# Altium PCB Roa_Circuit_2nd.PcbDoc
Units mil, origin at the board's own origin, x right, y up, seen from the top; angles counter-clockwise.
Board outline 6575 x 3150 mil, 4 copper layers (Top Layer, Layer 1, Layer 2, Bottom Layer), stack 26.468 mil thick; 43 components, 29 nets, 176 pads, 497 vias.
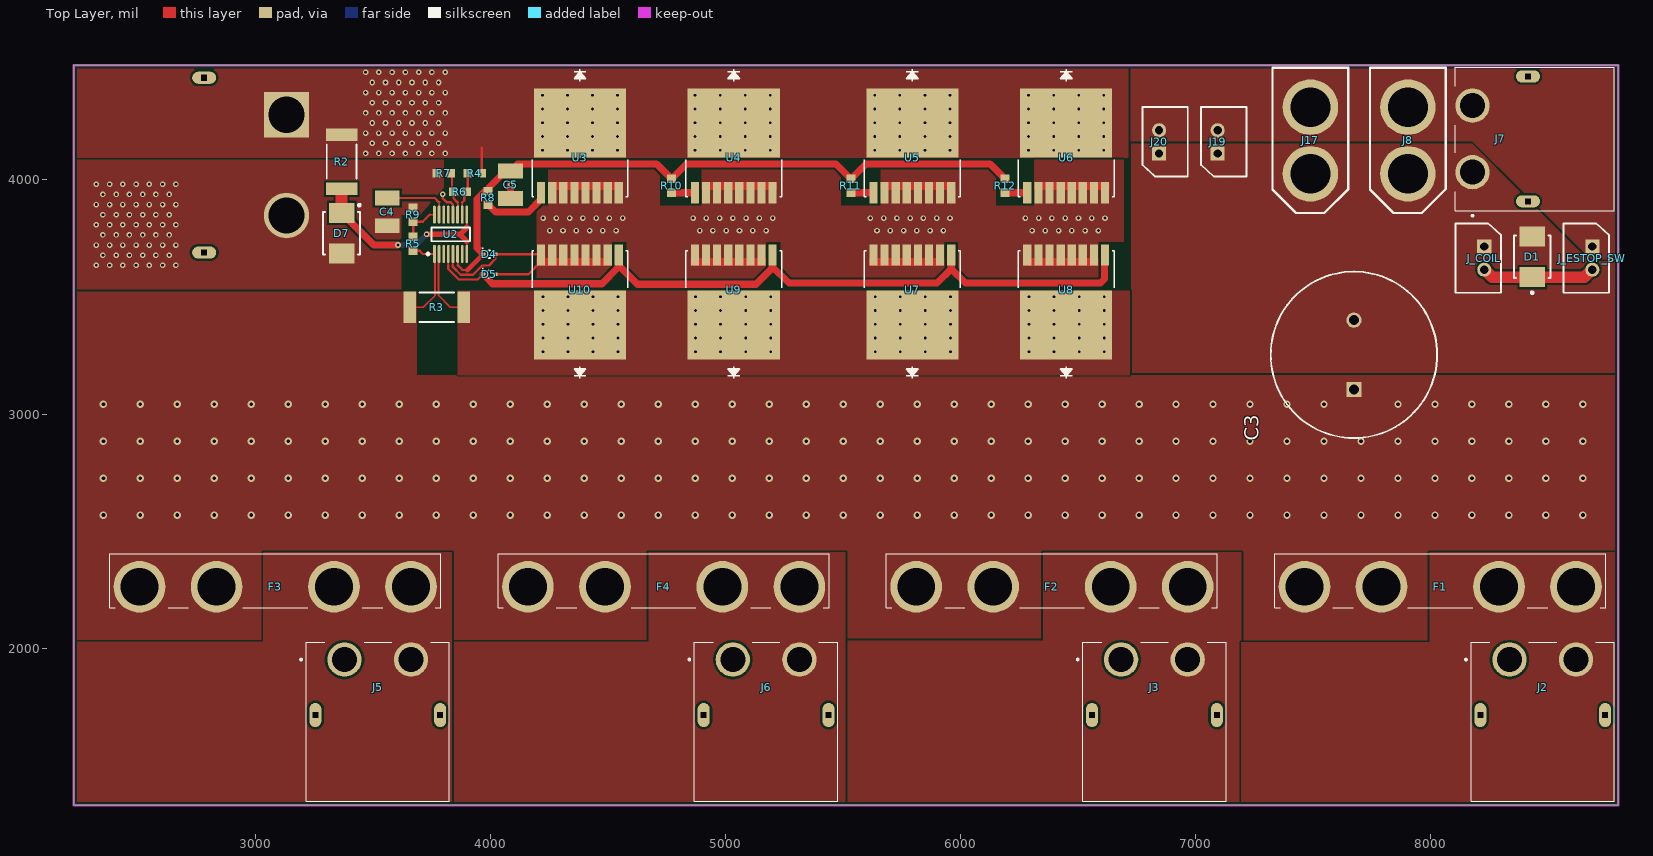
[diagram p0: Top Layer view]
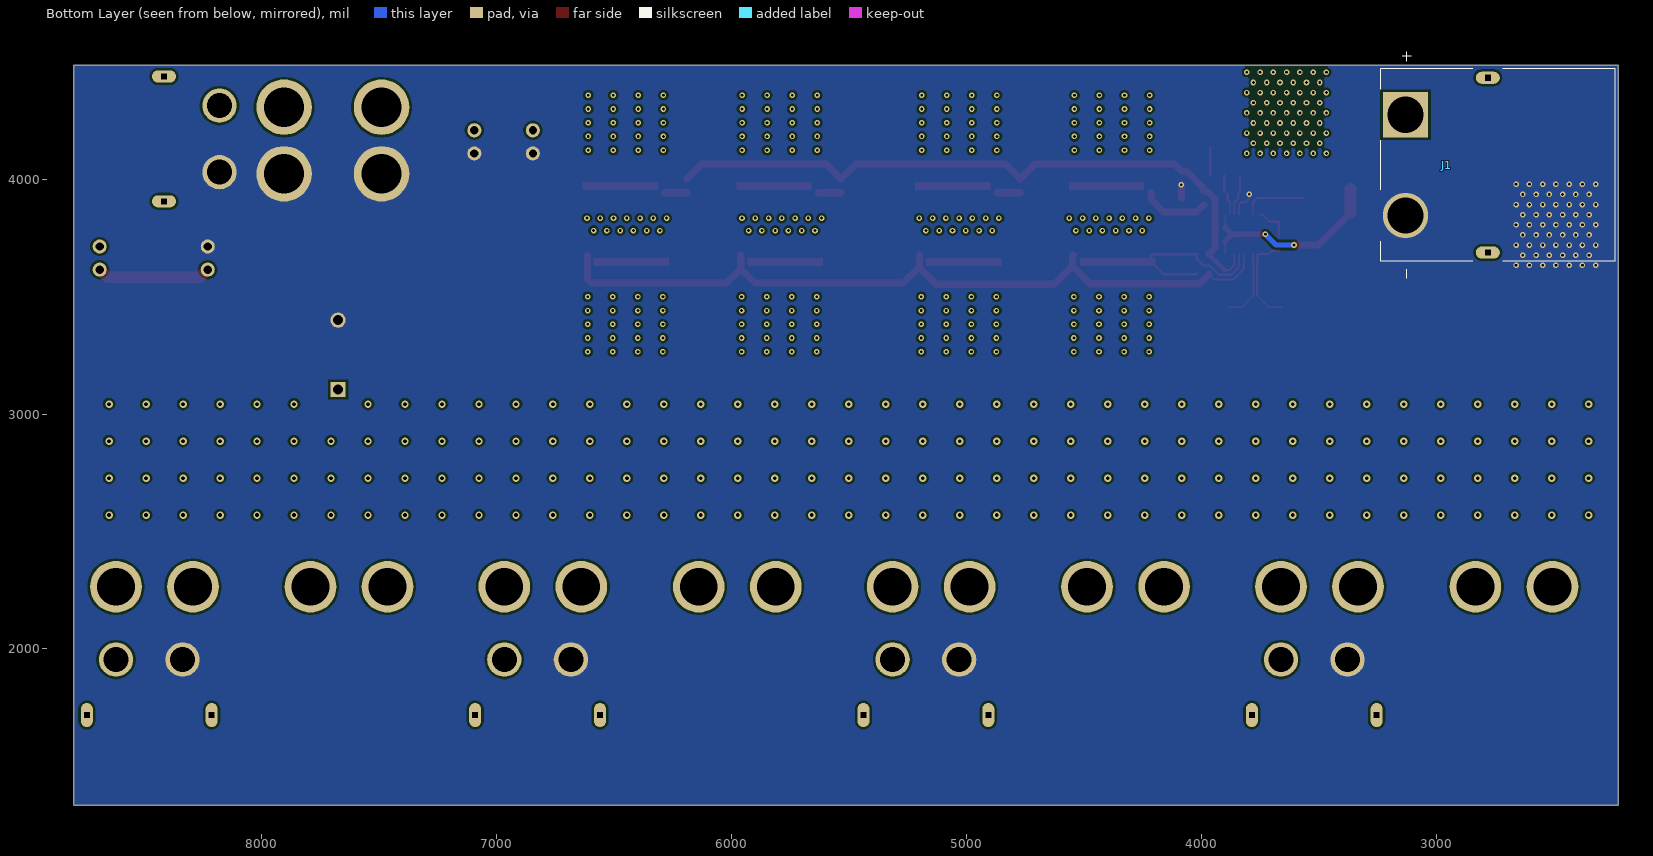
[diagram p1: Bottom Layer view, seen from below]
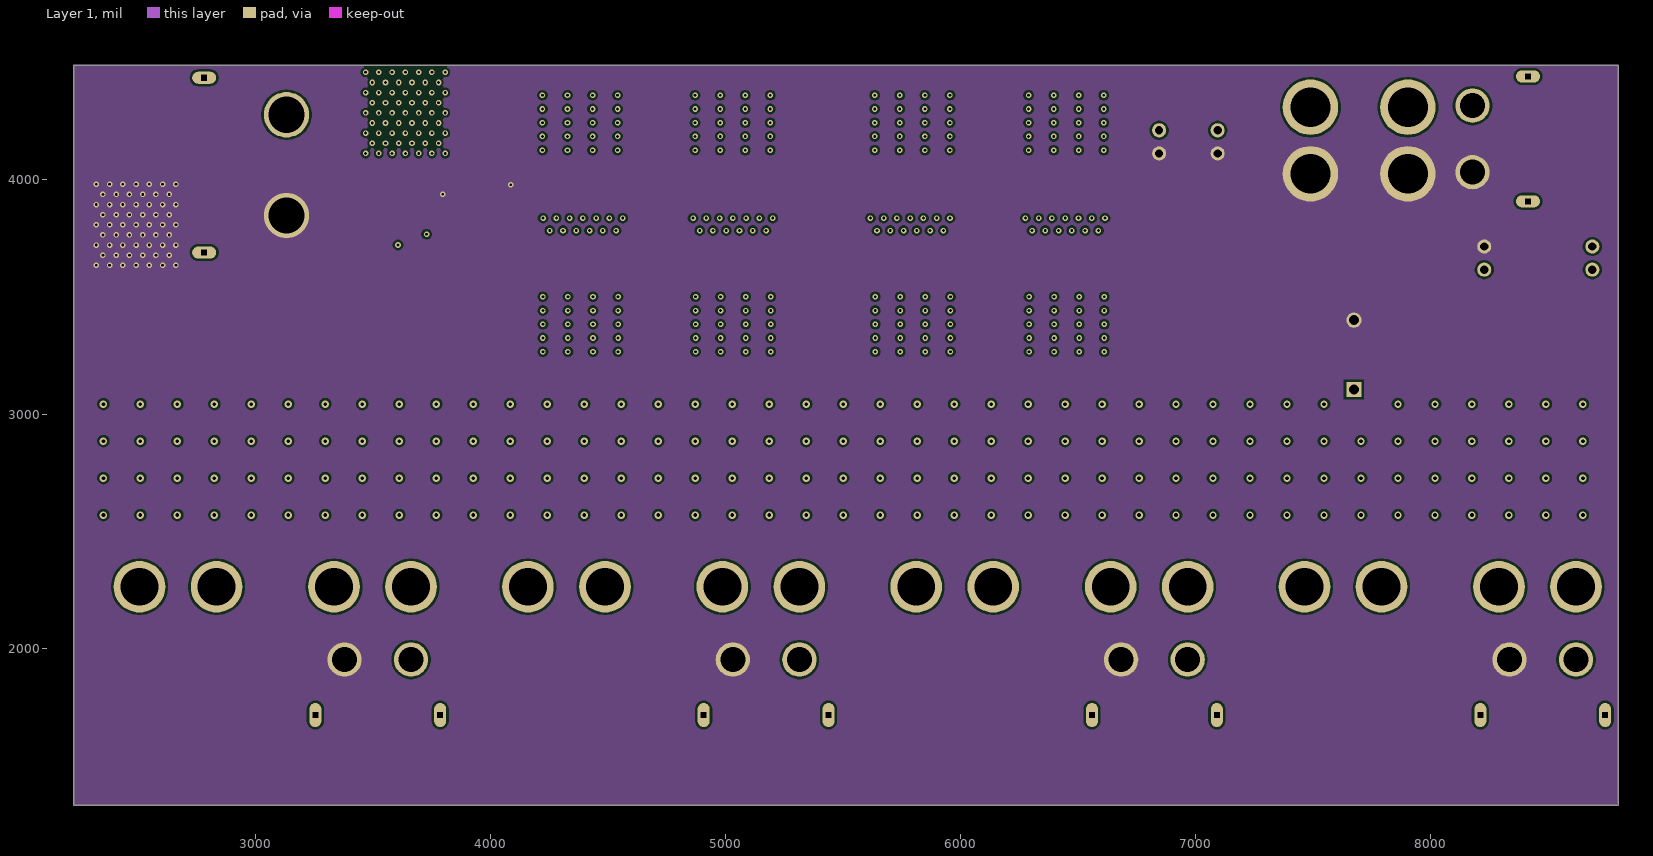
[diagram p2: Layer 1]
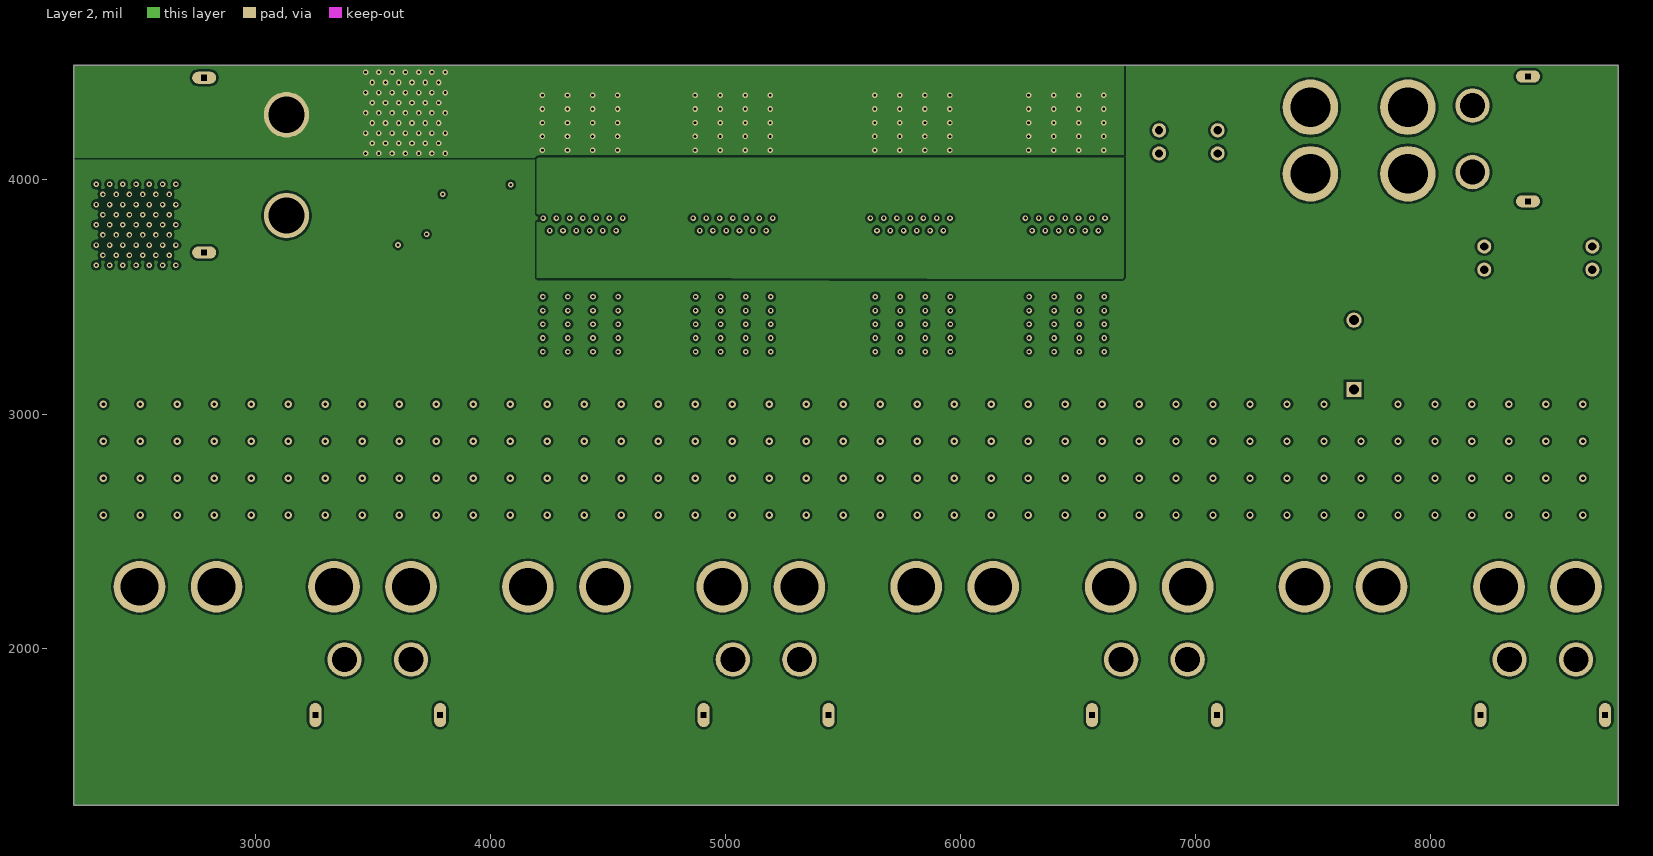
[diagram p3: Layer 2]

## Layer stack, top to bottom
Top Solder: solder mask 0.4, Solder Resist, Dk 3.5
Top Layer: signal copper 2.7559
Dielectric 2: prepreg 2.8, PP-006, Dk 4.1
Layer 1: signal copper 1.378
Dielectric 1: dielectric 12.6, FR-4, Dk 4.8
Layer 2: signal copper 1.378
Dielectric 3: prepreg 2.8, PP-006, Dk 4.1
Bottom Layer: signal copper 2.7559
Bottom Solder: solder mask 0.4, Solder Resist, Dk 3.5

## Board outline
2225,1335 2225,4485 8800,4485 8800,1335.39 8800,1335

## Design rules (kind name [scope] priority, off if disabled: settings)
Clearance "Stitching LEG_L" [IsStitchingVia and InNet('LEG_L') vs (IsVia and (Not IsStitchingVia)) Or IsPad] p1: gap=10 ignorepadtopadclearanceinfootprint=TRUE
Clearance "Stitching I_SENSE_N" [IsStitchingVia and InNet('I_SENSE_N') vs (IsVia and (Not IsStitchingVia)) Or IsPad] p2: gap=5 ignorepadtopadclearanceinfootprint=FALSE
Clearance "Stitching V_IN" [IsStitchingVia and InNet('V_IN') vs (IsVia and (Not IsStitchingVia)) Or IsPad] p3: gap=5 ignorepadtopadclearanceinfootprint=FALSE
Clearance Clearance_1 [InNet('I_SENSE_N') vs InNet('I_SENSE_P')] p4: gap=6 ignorepadtopadclearanceinfootprint=TRUE
Clearance [All] p5: gap=10 ignorepadtopadclearanceinfootprint=TRUE
DiffPairsRouting [All] p1: maxlimit=10 minlimit=6 mostfreqgap=7 toplayer_minwidth=8 toplayer_maxwidth=15 toplayer_prefwidth=10 midlayer1_minwidth=8 midlayer1_maxwidth=15 midlayer1_prefwidth=10 midlayer2_minwidth=8 midlayer2_maxwidth=15 midlayer2_prefwidth=10 bottomlayer_minwidth=8 bottomlayer_maxwidth=15 bottomlayer_prefwidth=10 maxuncoupledlength=500
Height [All] p1: minheight=0 maxheight=2000 prefheight=500
HoleSize [All] p1: absolutevalues=TRUE maxlimit=500 minlimit=1 maxpercent=80.000 minpercent=20.000
PlaneConnect [All] p1: planeconnectstyle=Direct reliefexpansion=20 reliefentries=4 reliefconductorwidth=10 reliefairgap=10
PolygonConnect [All] p1: connectstyle=Direct reliefconductorwidth=10 reliefentries=4 polygonreliefangle="90 Angle" airgapwidth=10
RoutingVias [All] p1: holewidth=28 width=50 viastyle="Through Hole" minholewidth=28 minwidth=50 maxholewidth=28 maxwidth=50
SolderMaskExpansion [All] p1: expansion=4 istentingtop=FALSE
SupplyNets "Schematic Supply Nets" [InNet('GND')] p1: voltage=0.000
Width Width_1 [(InNet('5V') OR InNet('COIL_EN') OR InNet('GND') OR InNet('NetR3_1') OR InNet('I_SENSE_N') OR InNet('I_SENSE_P')or InNet('VCC'))] p1: maxlimit=80 minlimit=6 preferedwidth=50 midlayer1_minwidth=10 midlayer1_maxwidth=10 midlayer1_prefwidth=10 midlayer2_minwidth=10 midlayer2_maxwidth=10 midlayer2_prefwidth=10 bottomlayer_minwidth=10 minimp=50.000000 maximp=50.000000 favimp=50.000000
Width [All] p2: maxlimit=30 minlimit=6 preferedwidth=10 midlayer1_minwidth=10 midlayer1_maxwidth=10 midlayer2_minwidth=10 midlayer2_maxwidth=10 bottomlayer_minwidth=10 bottomlayer_maxwidth=10 minimp=50.000000 maximp=50.000000 favimp=50.000000
26 further rules are at their usual default settings.

## Components (designator, comment, footprint, x,y, rotation, side; value= is the part's Value field where it differs from the comment)
C3 "B41858C9477M000" CAPPRD750W90D1800H3700 7675,3104.72 r90 top
C4 "non-polar_Capacitor" 1210 3559.29,3861.42 r90 top
C5 "non-polar_Capacitor" 1210 4085,3976.44 r90 top
D1 "cc" FP-403A-03-MFG 8435,3670 r90 top
D4 "MM5Z15VT1G" ONSC-SOD-523-2-502-01_V 3994.03,3681.03 r0 top
D5 "MM5Z15VT1G" ONSC-SOD-523-2-502-01_V 3994.03,3595 r0 top
D7 "1SMB5945BT3G" ONSC-SMB-2-403A-03_H_V 3365,3770 r270 top
F1 "3555-2" FUSE_3555-2 8042.56,2265 r180 top
F2 "3555-2" FUSE_3555-2 6389.23,2265 r180 top
F3 "3555-2" FUSE_3555-2 3082.56,2265 r180 top
F4 "3555-2" FUSE_3555-2 4735.89,2265 r180 top
J1 "XT90PW-F" AMASS_XT90PW-F 2780,4060 r90 bottom
J2 "XT60PW-F" XT60PW-F 8478.98,1955 r0 top
J3 "XT60PW-F" XT60PW-F 6825.64,1955 r0 top
J5 "XT60PW-F" XT60PW-F 3518.98,1955 r0 top
J6 "XT60PW-F" XT60PW-F 5172.31,1955 r0 top
J7 "XT60PW-F" XT60PW-F 8180,4171.73 r90 top
J8 "XT60" XT60_F 7905,4165 r90 top
J17 "XT60" XT60_F 7490,4165 r90 top
J19 "Molex_2Pin" MOLEX_2PIN 7095,4208.43 r90 top
J20 "Molex_2Pin" MOLEX_2PIN 6845.71,4208.43 r90 top
J_COIL "Molex_2Pin" MOLEX_2PIN 8230,3615 r270 top
J_ESTOP_SW "Molex_2Pin" MOLEX_2PIN 8690,3615 r270 top
R2 "2.2kΩ" SMD_2512 3365,4075 r270 top
R3 "0.5mΩ" SMD_2512 3770,3455 r180 top
R4 "464kΩ" SMD_0603 3931.65,4025.79 r180 top
R5 "442kΩ" SMD_0603 3669.29,3725.47 r90 top
R6 "6.65kΩ" SMD_0603 3868.54,3946.91 r180 top
R7 "10kΩ" SMD_0603 3799.76,4025.79 r180 top
R8 "10Ω" SMD_0603 3988.74,3920.5 r270 top
R9 "10kΩ" SMD_0603 3669.29,3849.13 r90 top
R10 "10Ω" SMD_0603 4770,3972.03 r270 top
R11 "10Ω" SMD_0603 5533.7,3972.03 r270 top
R12 "10Ω" SMD_0603 6190,3972.03 r270 top
U2 "LTC4364IMS-2#PBF" LT-MS-16_M 3829.29,3765.47 r90 top
U3 "IPT015N10N5ATMA1" PG-HSOF-8-1_INF 4379.65,4139 r0 top
U4 "IPT015N10N5ATMA1" PG-HSOF-8-1_INF 5034.65,4139 r0 top
U5 "IPT015N10N5ATMA1" PG-HSOF-8-1_INF 5795,4139 r0 top
U6 "IPT015N10N5ATMA1" PG-HSOF-8-1_INF 6450,4139 r0 top
U7 "IPT015N10N5ATMA1" PG-HSOF-8-1_INF 5795,3481 r180 top
U8 "IPT015N10N5ATMA1" PG-HSOF-8-1_INF 6450,3481 r180 top
U9 "IPT015N10N5ATMA1" PG-HSOF-8-1_INF 5034.65,3481 r180 top
U10 "IPT015N10N5ATMA1" PG-HSOF-8-1_INF 4379.65,3481 r180 top

## Footprints (in the part's own frame and the unit in brackets; to place one, negate y for a bottom-side part, rotate by r counter-clockwise, add the part's x,y. Pads: shape width x height; smd on the part's side, far side on the other; paste and mask are expansions set on the pad)
1210 [mm]
  rect 1.6x2.7 smd: 1(-1.5,0) 2(1.5,0)
  body extent -1.75,-1.4 1.75,1.4, height 2.8
AMASS_XT90PW-F [mm]
  round 4.916 hole 3.9: N(-5.45,8.9)
  rect 4.916x4.916 / inner round 4.916 / far side rect 4.916x4.916 hole 3.9: P(5.45,8.9)
  oval 1.3x2.6 hole 0.6 square: S1(9.45,0) S2(-9.45,0)
  silkscreen extent -12.25,-13.8 12.25,11.6, body extent -10.65,-13.8 10.65,11.6, height 10.3
CAPPRD750W90D1800H3700 [mm]
  rect 1.65x1.65 hole 1.1: 1(0,0)
  round 1.65 hole 1.1: 2(7.5,0)
  silkscreen extent -5.25,-9 12.75,9, body extent -4.35,-8.1 11.85,8.1, height 35.86
FP-403A-03-MFG [mil]
  rect 85x107.99 smd paste+0 mask+0: 1(-87.01,0) 2(87.01,0)
  silkscreen extent -157,-78 91,78, body extent -133,-82 133,82, height 10
FUSE_3555-2 [mm]
  round 5.59 hole 4.09: 1_1(-14.685,0) 1_2(-6.355,0) 2_1(6.345,0) 2_2(14.675,0)
  silkscreen extent -17.91,-3.59 17.91,2.25, body extent -17.91,-11.51 17.91,-5.67, height 12.97
LT-MS-16_M [mm] "SOP, 16-Leads, Body 4.1x3.1mm, Pitch 0.5mm, IPC Low Density"
  oval 1.95x0.3 smd: 1(-2.125,1.75) 2(-2.125,1.25) 3(-2.125,0.75) 4(-2.125,0.25) 5(-2.125,-0.25) 6(-2.125,-0.75) 7(-2.125,-1.25) 8(-2.125,-1.75) 9(2.125,-1.75) 10(2.125,-1.25) 11(2.125,-0.75) 12(2.125,-0.25) 13(2.125,0.25) 14(2.125,0.75) 15(2.125,1.25) 16(2.125,1.75)
  silkscreen extent -2.25,-2.08 0.75,2.57, body extent -1.55,-2.05 1.55,2.05, height 1.1
MOLEX_2PIN [mil]
  rect 60x60 / inner round 60 / far side round 60 hole 35: 1(-98.43,0)
  round 60 hole 35: 2(0,0)
  silkscreen extent -197,-122 98,71, body extent -196,-123 95,70, height 233
ONSC-SMB-2-403A-03_H_V [mil] "Molded, 2-Leads, Body 4.6x3.95mm"
  rect 85x107.99 smd: 1(-87.01,0) 2(87.01,0)
  silkscreen extent -125,-79 91,81, body extent -91,-78 91,78, height 95
ONSC-SOD-523-2-502-01_V [mm] "SOD, 2-Leads, Body 1.2x0.8mm"
  rect 0.48x0.4 smd: 1(-0.66,0) 2(0.66,0)
  silkscreen extent -0.75,-0.4 0.07,0.65, body extent -0.6,-0.4 0.6,0.4, height 0.7
PG-HSOF-8-1_INF [mil]
  rect 35x91 smd paste+0 mask+0: 1(-165.35,-196.5) 2(-118.11,-196.5) 3(-70.87,-196.5) 4(-23.62,-196.5) 5(23.62,-196.5) 6(70.87,-196.5) 7(118.11,-196.5) 8(165.35,-196.5)
  rect 392x294 smd paste+0 mask+0: 9(0,101)
  Top Layer region: -135.61,-183 -135.61,-151 182.85,-151 182.85,-183
  silkscreen extent -204,-214 204,328
SMD_0603 [mm] "SMD 0603 SIZE"
  rect 0.9x0.95 smd: 1(-0.75,0) 2(0.75,0)
  body extent -0.85,-0.48 0.85,0.48, height 0.55
SMD_2512 [mm] "SMD 2512 SIZE"
  rect 1.35x3.4 smd: 1(-2.925,0) 2(2.925,0)
  silkscreen extent -1.85,-1.6 1.85,1.6, body extent -3.25,-1.7 3.25,1.7, height 0.7
XT60_F [mm]
  round 6 hole 4.3: 1(-3.6,0) 2(3.6,0)
  silkscreen extent -7.85,-4.1 7.85,4.1, body extent -7.8,-4 7.8,4, height 16.8
XT60PW-F [mm]
  round 3.716 hole 2.7: 1(-3.6,0) 2(3.6,0)
  oval 1.3x2.6 hole 0.6 square: S1(-6.75,-6) S2(6.75,-6)
  silkscreen extent -8.4,-15.35 7.75,1.85, body extent -7.75,-15.35 7.75,1.85, height 8.4

## Part data
C3: "Capacitor Polarised", Manufacturer_Name=TDK, Mouser Part Number=871-B41858C9477M, Datasheet Link=https://product.tdk.com/system/files/dam/doc/product/capacitor/aluminum-electrolytic/single-ended/data_sheet/20/30/db/aec/b41858.pdf, Height=37mm, Manufacturer_Part_Number=B41858C9477M000, Mouser Price/Stock=https://www.mouser.co.uk/ProductDetail/EPCOS-TDK/B41858C9477M000?qs=nadT%2FcWsIvCTpIhXZMST%2FQ%3D%3D
C4: library part CMP-024-000020-15, "SMD type ceramic capacitor", Capacitance=0.47µF, Voltage=50V, Design Item ID=Capacitor, Source=robit_passive.SchLib
C5: library part CMP-024-000020-15, "SMD type ceramic capacitor", Capacitance=0.1µF, Voltage=50V, Design Item ID=Capacitor, Source=robit_passive.SchLib
D1: library part CMP-026-000004-1, "Rectifier Diode, Schottky, 1 Phase, 1 Element, 5A, 100V V(RRM), Silicon"
D4 D5: library part CMP-1060-00793-1, "Zener Voltage Regulator, 500 mW, 2-Pin SOD-523, Pb-Free, Tape and Reel", Manufacturer="On Semiconductor", ComponentLink1Description="Manufacturer URL", ComponentLink1URL=http://www.onsemi.com/, ComponentLink2Description=Datasheet, ComponentLink2URL=http://www.onsemi.cn/pub_link/Collateral/MM5Z2V4T1-D.PDF, ComponentLink3Description="Package Specification", ComponentLink3URL=http://www.onsemi.com/pub_link/Collateral/502-01.PDF, DatasheetVersion="Rev. 10", Mounting Technology="Surface Mount", P Max (W)=0.5, PackageDescription="2-Pin SOD, Body 1.2 x 0.8 mm", PackageReference=SOD-523-2-502-01, PackageVersion="Rev. E, 09/2010", Packing="Tape and Reel", PartNumber=MM5Z15VT1G, RoHS=Pb-Free, VZ Typ (V)=15
D7: library part CMP-1060-00175-1, "3 W Zener Voltage Regulator, 2-Pin SMB, Pb-Free, Tape and Reel", Manufacturer="On Semiconductor", ComponentLink1Description="Manufacturer URL", ComponentLink1URL=http://www.onsemi.com/, ComponentLink2Description=Datasheet, ComponentLink2URL=http://www.onsemi.com/pub_link/Collateral/1SMB5913BT3-D.PDF, ComponentLink3Description="Package Specification", ComponentLink3URL=http://www.onsemi.com/pub_link/Collateral/1SMB5913BT3-D.PDF, DatasheetVersion="Rev. 8", Mounting Technology="Surface Mount", PackageDescription="2-Pin Small Molded Package, J-Bend Lead, Body 4.33 x 3.625 mm", PackageReference=SMB-2-403A-03_H, PackageVersion="Rev. H, 05/2011", Packing="Tape and Reel", PartNumber=1SMB5945BT3G, RoHS=Pb-Free, VZ Typ (V)=68
F1 F2 F3 F4: "Auto Fuse Holder, 1 Fuse, Blade, Standard, THM, 50Amp, Hi-Temp Nylon, UL94V-0", Package=None, Check_prices=https://www.snapeda.com/parts/3555-2/Keystone/view-part/?ref=eda, MF="Keystone Electronics", MP=3555-2, SnapEDA_Link=https://www.snapeda.com/parts/3555-2/Keystone/view-part/?ref=snap
J1: library part CMP-019-000093-4, "Socket, DC supply, XT90, female, PIN:2, on PCBs, THT", Package=Package, Check_prices=https://www.snapeda.com/parts/XT90PW-F/AMASS/view-part/?ref=eda, Component Type=Standard, Design Item ID=XT90PW-F, MF=AMASS, MP=XT90PW-F, Pin Count=2, SnapEDA_Link=https://www.snapeda.com/parts/XT90PW-F/AMASS/view-part/?ref=snap, Source=XT90PW-F.SchLib, System=Connector
J2 J3 J5 J6 J7: library part CMP-019-000058-2, "Socket DC Supply Connector Female", Package=Package, Availability="Not in stock", Check_prices=https://www.snapeda.com/parts/XT60PW-F/AMASS/view-part/?ref=eda, Design Item ID=XT60PW-F, MF=AMASS, MP=XT60PW-F, Price=None, SnapEDA_Link=https://www.snapeda.com/parts/XT60PW-F/AMASS/view-part/?ref=snap, Source=robit_connector.SchLib, System=Connector
J8 J17: library part CMP-019-000061-2, "XT60 connector", System=Connector
J19 J20 J_COIL J_ESTOP_SW: library part CMP-019-000043-2, "Molex 2Pin Connector", Design Item ID=Molex_2Pin, Source=robit_connector.SchLib, System=Connector
R2 R3 R4 R5 R6 R7 R8 R9 R10 R11 R12: library part Resistor
U2: library part CMP-0474-00539-1, "Surge Stopper with Ideal Diode, 4 to 80 V Vin, 16-pin SOP (MS-16), -40 to 85 degC, Pb-Free", Extended Temp="C, I, H", Manufacturer="Linear Technology", Power Good=no, Active Limiting=yes, Circuit Breaker Accuracy(%)=10, Circuit Breaker Threshold="50 mV", Circuit Breakers(#)=1, ComponentLink1Description="Manufacturer URL", ComponentLink1URL=http://www.linear.com/, ComponentLink2Description=Datasheet, ComponentLink2URL=http://cds.linear.com/docs/en/datasheet/436412f.pdf, ComponentLink3Description="Package Specification", ComponentLink3URL=http://cds.linear.com/docs/en/packaging/05081669_A_MS16.pdf, Fast Comparator=no, Mounting Technology="Surface Mount", PackageDescription="16-Pin Plastic MSOP, Body 4.04 x 3.00 mm, Pitch 0.50 mm", PackageReference=MS16, PackageVersion="Rev. Ã˜, 06/2010", PartNumber=LTC4364IMS-2#PBF, RoHS=TRUE, Vin Range="4 to 80 V"
U3 U4 U5 U6 U7 U8 U9 U10: "Infineonâ€™s OptiMOSâ„¢ power MOSFET in TO-Leadless package is optimized for high current applications up to 300 A, such as forklifts, light electric vehicles (LEV), power tools, point-of-loads (POL), telecom and e-fuses. Furthermore, the 60 percent smaller package size enables a very compact design. Compared to DÂ²PAK 7-pin, TO-Leadless shows a substantial reduction in footprint of 30 percent. The 50 percent reduced height offers a significant advantage in narrow applications such as rack or blade servers.", Manufacturer_Name=Infineon, Copyright="Copyright (C) 2025 Ultra Librarian. All rights reserved.", Manufacturer_Part_Number=IPT015N10N5ATMA1, RefDes=RefDes, Type=Type

## Via types
v1: diameter 23.62, hole 11.81, Top Layer to Bottom Layer, 334 vias
v2: diameter 31.5, hole 15.75, Top Layer to Bottom Layer, 163 vias

## Nets (pads, with @x,y where several pads share a name; then routed paths per layer and width w, separated by ;. In a path a pad name is that pad's centre, name@x,y a point inside that pad or via, vN(x,y) a via of type N, cw(c..) or ccw(c..) an arc to the next point about the centre after c; other vN are vias at no path point)
5V: 
12v_IN: J7.2 J8.2 J17.2 J19.2 J20.2 J_ESTOP_SW.1
ARM_L: F3.1_1 F3.1_2 J5.2
ARM_R: F1.1_1 F1.1_2 J2.2
CAN_H: 
CAN_L: 
COIL_EN: D1.1 J_COIL.2 J_ESTOP_SW.2 | length 486.5
  Top Layer w50: J_COIL.2 8232.28,3615 8264.29,3582.99 8655.29,3582.99 8687.29,3615 J_ESTOP_SW.2
DGATE: D5.1 U2.4 U7.1 U8.1 U9.1 U10.1 | length 3335.7
  Top Layer w6: 3818.82,3633.59 3818.82,3681.18 U2.4
  Top Layer w10: 3818.82,3633.59 3818.82,3618.4 3863.89,3573.33 3944.8,3573.33 3963.59,3592.13 3965.17,3592.13 D5.1
  Top Layer w30: D5.1 3985.56,3577.48 3985.56,3576.77 4007.33,3555 4473.61,3555 4542.5,3623.89 ; U10.1 4547.5,3675 4547.5,3629.5 4624.22,3552.78 5129.39,3552.78 5195.26,3618.64 5195.26,3621.71 5200.19,3626.64 ; U9.1@5200.19,3677.31 5200.19,3626.64 ; U7.1@5960.54,3677.31 5960.54,3617.78 ; U8.1@6615.35,3675.09 6613.04,3672.78 6613.04,3575.35 6595.47,3557.78 6020.54,3557.78 5960.54,3617.78 ; 5200.19,3626.64 5269.05,3557.78 5900.54,3557.78 5960.54,3617.78
ENABLE: U2.14
FAULT: U2.13
FB: R5.2 R9.1 U2.16 | length 167.9
  Top Layer w6: 3739.63,3849.13 U2.16
  Top Layer w10: R5.2 R9.1 3710.1,3819.61 3739.63,3849.13
GND: C3.2 C4.1 C5.1 D1.2 D7.2 J1.N J2.1 J3.1 J5.1 J6.1 J7.1 J8.1 J17.1 J19.1 J20.1 J_COIL.1 R7.2 R9.2 U2.12 | length 174.4
  Top Layer w6: U2.12 3838.35,3849.91 3838.35,3890.71 3839.13,3891.49
  Top Layer w10: v1(3795.14,3936.08) 3795.14,3919.24 3811.87,3902.52 3828.11,3902.52 3839.13,3891.49
  Top Layer w30: C5.1 v1(4085,3976.44)
  other v1: 2320.34,3633.37 2376.85,3633.37 2433.35,3633.37 2489.85,3633.37 2546.35,3633.37 2602.85,3633.37 2659.35,3633.37 2348.59,3676.49 2405.1,3676.49 2461.6,3676.49 2518.1,3676.49 2574.6,3676.49 2631.1,3676.49 2320.34,3719.62 2376.85,3719.62 2433.35,3719.62 2489.85,3719.62 2546.35,3719.62 2602.85,3719.62 2659.35,3719.62 2348.59,3762.74 2405.1,3762.74 2461.6,3762.74 2518.1,3762.74 2574.6,3762.74 2631.1,3762.74 2320.34,3805.87 2376.85,3805.87 2433.35,3805.87 2489.85,3805.87 2546.35,3805.87 2602.85,3805.87 2659.35,3805.87 2348.59,3848.99 2405.1,3848.99 2461.6,3848.99 2518.1,3848.99 2574.6,3848.99 2631.1,3848.99 2320.34,3892.12 2376.85,3892.12 2433.35,3892.12 2489.85,3892.12 2546.35,3892.12 2602.85,3892.12 2659.35,3892.12 2348.59,3935.24 2405.1,3935.24 2461.6,3935.24 2518.1,3935.24 2574.6,3935.24 2631.1,3935.24 2320.34,3978.37 2376.85,3978.37 2433.35,3978.37 2489.85,3978.37 2546.35,3978.37 2602.85,3978.37 2659.35,3978.37
HEAD: 
HGATE: C5.2 D4.1 R8.1 R10.1 R11.1 R12.1 U2.6 | length 2887.8
  Top Layer w6: 3858.82,3634.97 U2.6 ; 3878.5,3615.28 3880.45,3613.33
  Top Layer w10: 3858.82,3634.97 3878.5,3615.28 ; 3880.45,3613.33 3900.35,3613.33
  Top Layer w20: 3900.35,3613.33 D4.1
  Top Layer w30: D4.1 3940.78,3708.29 3940.78,3914.79 3973.31,3947.31 3985.04,3947.31 3987.76,3950.03 R8.1 ; R8.1@3989.72,3950.03 3992.44,3952.74 3992.44,3964.58 4063.35,4035.49 C5.2 4114.51,4065 4706.56,4065 4766.3,4005.26 4766.3,4004.27 4769.02,4001.56 R10.1 ; R10.1@4770.98,4001.56 4773.7,4004.27 4773.7,4005.26 4833.44,4065 5470.26,4065 5530,4005.26 5530,4004.27 R11.1@5532.72,4001.56 ; R11.1 5534.69,4001.56 5537.4,4004.27 5537.4,4005.26 5597.15,4065 6126.56,4065 6186.3,4005.26 6186.3,4004.27 6189.02,4001.56 R12.1
I_SENSE_N: C3.1 F1.2_1 F1.2_2 F2.2_1 F2.2_2 F3.2_1 F3.2_2 F4.2_1 F4.2_2 R3.2 R5.1 U2.1 | length 403.3
  Top Layer w8: R3.2 3712.74,3455 3762.74,3505 3762.74,3645.96 3760.39,3648.3 U2.1
  Top Layer w10: R5.1 3669.93,3695.31 3697.13,3695.31 3710.63,3681.81 U2.1
  other v2: 2350.79,2570 2508.27,2570 2665.75,2570 2823.23,2570 2980.71,2570 3138.19,2570 3295.67,2570 3453.15,2570 3610.63,2570 3768.11,2570 3925.59,2570 4083.07,2570 4240.55,2570 4398.03,2570 4555.51,2570 4712.99,2570 4870.47,2570 5027.95,2570 5185.43,2570 5342.91,2570 5500.39,2570 5657.87,2570 5815.35,2570 5972.83,2570 6130.32,2570 6287.8,2570 6445.28,2570 6602.76,2570 6760.24,2570 6917.72,2570 7075.2,2570 7232.68,2570 7390.16,2570 7547.64,2570 7705.12,2570 7862.6,2570 8020.08,2570 8177.56,2570 8335.04,2570 8492.52,2570 8650,2570 2350.79,2727.48 2508.27,2727.48 2665.75,2727.48 2823.23,2727.48 2980.71,2727.48 3138.19,2727.48 3295.67,2727.48 3453.15,2727.48 3610.63,2727.48 3768.11,2727.48 3925.59,2727.48 4083.07,2727.48 4240.55,2727.48 4398.03,2727.48 4555.51,2727.48 4712.99,2727.48 4870.47,2727.48 5027.95,2727.48 5185.43,2727.48 5342.91,2727.48 5500.39,2727.48 5657.87,2727.48 5815.35,2727.48 5972.83,2727.48 6130.32,2727.48 6287.8,2727.48 6445.28,2727.48 6602.76,2727.48 6760.24,2727.48 6917.72,2727.48 7075.2,2727.48 7232.68,2727.48 7390.16,2727.48 7547.64,2727.48 7705.12,2727.48 7862.6,2727.48 8020.08,2727.48 8177.56,2727.48 8335.04,2727.48 8492.52,2727.48 8650,2727.48 2350.79,2884.96 2508.27,2884.96 2665.75,2884.96 2823.23,2884.96 2980.71,2884.96 3138.19,2884.96 3295.67,2884.96 3453.15,2884.96 3610.63,2884.96 3768.11,2884.96 3925.59,2884.96 4083.07,2884.96 4240.55,2884.96 4398.03,2884.96 4555.51,2884.96 4712.99,2884.96 4870.47,2884.96 5027.95,2884.96 5185.43,2884.96 5342.91,2884.96 5500.39,2884.96 5657.87,2884.96 5815.35,2884.96 5972.83,2884.96 6130.32,2884.96 6287.8,2884.96 6445.28,2884.96 6602.76,2884.96 6760.24,2884.96 6917.72,2884.96 7075.2,2884.96 7232.68,2884.96 7390.16,2884.96 7547.64,2884.96 7705.12,2884.96 7862.6,2884.96 8020.08,2884.96 8177.56,2884.96 8335.04,2884.96 8492.52,2884.96 8650,2884.96 2350.79,3042.44 2508.27,3042.44 2665.75,3042.44 2823.23,3042.44 2980.71,3042.44 3138.19,3042.44 3295.67,3042.44 3453.15,3042.44 3610.63,3042.44 3768.11,3042.44 3925.59,3042.44 4083.07,3042.44 4240.55,3042.44 4398.03,3042.44 4555.51,3042.44 4712.99,3042.44 4870.47,3042.44 5027.95,3042.44 5185.43,3042.44 5342.91,3042.44 5500.39,3042.44 5657.87,3042.44 5815.35,3042.44 5972.83,3042.44 6130.32,3042.44 6287.8,3042.44 6445.28,3042.44 6602.76,3042.44 6760.24,3042.44 6917.72,3042.44 7075.2,3042.44 7232.68,3042.44 7390.16,3042.44 7547.64,3042.44 7862.6,3042.44 8020.08,3042.44 8177.56,3042.44 8335.04,3042.44 8492.52,3042.44 8650,3042.44
I_SENSE_P: R3.1 U2.2 U7.9 U8.9 U9.9 U10.9 | length 305.9
  Top Layer w8: U2.2 3780.08,3648.3 3777.74,3645.96 3777.74,3505 3827.74,3455 R3.1
  other v1: 4221.96,3265.59 4328.63,3265.59 4435.29,3265.59 4541.96,3265.59 4871.96,3265.59 4978.63,3265.59 5085.29,3265.59 5191.96,3265.59 5636.96,3265.59 5743.63,3265.59 5850.29,3265.59 5956.96,3265.59 6291.96,3265.59 6398.63,3265.59 6505.29,3265.59 6611.96,3265.59 4221.96,3324.04 4328.63,3324.04 4435.29,3324.04 4541.96,3324.04 4871.96,3324.04 4978.63,3324.04 5085.29,3324.04 5191.96,3324.04 5636.96,3324.04 5743.63,3324.04 5850.29,3324.04 5956.96,3324.04 6291.96,3324.04 6398.63,3324.04 6505.29,3324.04 6611.96,3324.04 4221.96,3382.49 4328.63,3382.49 4435.29,3382.49 4541.96,3382.49 4871.96,3382.49 4978.63,3382.49 5085.29,3382.49 5191.96,3382.49 5636.96,3382.49 5743.63,3382.49 5850.29,3382.49 5956.96,3382.49 6291.96,3382.49 6398.63,3382.49 6505.29,3382.49 6611.96,3382.49 4221.96,3440.94 4328.63,3440.94 4435.29,3440.94 4541.96,3440.94 4871.96,3440.94 4978.63,3440.94 5085.29,3440.94 5191.96,3440.94 5636.96,3440.94 5743.63,3440.94 5850.29,3440.94 5956.96,3440.94 6291.96,3440.94 6398.63,3440.94 6505.29,3440.94 6611.96,3440.94 4221.96,3499.39 4328.63,3499.39 4435.29,3499.39 4541.96,3499.39 4871.96,3499.39 4978.63,3499.39 5085.29,3499.39 5191.96,3499.39 5636.96,3499.39 5743.63,3499.39 5850.29,3499.39 5956.96,3499.39 6291.96,3499.39 6398.63,3499.39 6505.29,3499.39 6611.96,3499.39
LEG_L: F4.1_1 F4.1_2 J6.2
LEG_R: F2.1_1 F2.1_2 J3.2
NetD2_1: 
NetR8_2: R8.2 U3.1 | length 288.2
  Top Layer w30: R8.2 3989.72,3890.97 4019.81,3860.88 4160.67,3860.88 4214.29,3914.5 U3.1
NetR10_2: R10.2 U4.1 | length 99.3
  Top Layer w30: R10.2 U4.1
NetR11_2: R11.2 U5.1 | length 95.9
  Top Layer w30: R11.2 U5.1
NetR12_2: R12.2 U6.1 | length 94.6
  Top Layer w30: R12.2 U6.1
OV: R6.2 R7.1 U2.11 | length 176.6
  Top Layer w6: U2.11 3858.82,3901.32
  Top Layer w10: R7.1@3835.07,4015.94 3835.07,3950.84 3841.08,3944.84 3841.08,3919.06 3858.82,3901.32
SOURCE: D4.2 D5.2 U2.5 U3.2 U3.3 U3.4 U3.5 U3.6 U3.7 U3.8 U4.2 U4.3 U4.4 U4.5 U4.6 U4.7 U4.8 U5.2 U5.3 U5.4 U5.5 U5.6 U5.7 U5.8 U6.2 U6.3 U6.4 U6.5 U6.6 U6.7 U6.8 U7.2 U7.3 U7.4 U7.5 U7.6 U7.7 U7.8 U8.2 U8.3 U8.4 U8.5 U8.6 U8.7 U8.8 U9.2 U9.3 U9.4 U9.5 U9.6 U9.7 U9.8 U10.2 U10.3 U10.4 U10.5 U10.6 U10.7 U10.8 | length 738.9
  Top Layer w6: 3838.82,3633.79 3838.82,3681.5 U2.5
  Top Layer w10: 3838.82,3633.79 3838.82,3626.68 3872.17,3593.33 3923.95,3593.33 3963.55,3632.93 3991.9,3632.93 4020.01,3661.04 D4.2 4210.76,3681.03 U10.8 4214.29,3649.5 4159.79,3595 D5.2
  other v1: 4251.09,3781.22 4307.59,3781.22 4364.09,3781.22 4420.59,3781.22 4477.09,3781.22 4533.6,3781.22 4889.55,3781.22 4946.06,3781.22 5002.56,3781.22 5059.06,3781.22 5115.56,3781.22 5172.06,3781.22 5644.55,3781.22 5701.06,3781.22 5757.56,3781.22 5814.06,3781.22 5870.56,3781.22 5927.06,3781.22 6304.55,3781.22 6361.06,3781.22 6417.56,3781.22 6474.06,3781.22 6530.56,3781.22 6587.06,3781.22 4222.84,3834.35 4279.34,3834.35 4335.84,3834.35 4392.34,3834.35 4448.84,3834.35 4505.34,3834.35 4561.85,3834.35 4861.3,3834.35 4917.81,3834.35 4974.31,3834.35 5030.81,3834.35 5087.31,3834.35 5143.81,3834.35 5200.31,3834.35 5616.3,3834.35 5672.81,3834.35 5729.31,3834.35 5785.81,3834.35 5842.31,3834.35 5898.81,3834.35 5955.31,3834.35 6276.3,3834.35 6332.81,3834.35 6389.31,3834.35 6445.81,3834.35 6502.31,3834.35 6558.81,3834.35 6615.31,3834.35
TMR: C4.2 U2.15 | length 275.8
  Top Layer w6: U2.15 3780.08,3901.32
  Top Layer w10: C4.2@3564.29,3920.26 3761.15,3920.26 3780.08,3901.32
UV: R4.2 R6.1 U2.10 | length 176.5
  Top Layer w6: U2.10 3878.5,3901.11 3878.82,3901.42
  Top Layer w10: 3878.82,3901.42 3887.24,3909.84 3887.24,3936.08 3902,3950.84 R4.2@3902,4015.94
V_IN: J1.P R2.1 R4.1 U3.9 U4.9 U5.9 U6.9 | length 119.1
  Top Layer w10: R4.1@3961.06,4015.94 3961.06,4135.06
  other v1: 3467,4110 3523.5,4110 3580,4110 3636.5,4110 3693,4110 3749.5,4110 3806,4110 4220,4123.7 4326.67,4123.7 4433.33,4123.7 4540,4123.7 4870,4123.7 4976.67,4123.7 5083.33,4123.7 5190,4123.7 5635,4123.7 5741.67,4123.7 5848.33,4123.7 5955,4123.7 6290,4123.7 6396.67,4123.7 6503.33,4123.7 6610,4123.7 3495.25,4153.12 3551.75,4153.12 3608.25,4153.12 3664.75,4153.12 3721.25,4153.12 3777.75,4153.12 4220,4182.15 4326.67,4182.15 4433.33,4182.15 4540,4182.15 4870,4182.15 4976.67,4182.15 5083.33,4182.15 5190,4182.15 5635,4182.15 5741.67,4182.15 5848.33,4182.15 5955,4182.15 6290,4182.15 6396.67,4182.15 6503.33,4182.15 6610,4182.15 3467,4196.25 3523.5,4196.25 3580,4196.25 3636.5,4196.25 3693,4196.25 3749.5,4196.25 3806,4196.25 3495.25,4239.38 3551.75,4239.38 3608.25,4239.38 3664.75,4239.38 3721.25,4239.38 3777.75,4239.38 4220,4240.6 4326.67,4240.6 4433.33,4240.6 4540,4240.6 4870,4240.6 4976.67,4240.6 5083.33,4240.6 5190,4240.6 5635,4240.6 5741.67,4240.6 5848.33,4240.6 5955,4240.6 6290,4240.6 6396.67,4240.6 6503.33,4240.6 6610,4240.6 3467,4282.5 3523.5,4282.5 3580,4282.5 3636.5,4282.5 3693,4282.5 3749.5,4282.5 3806,4282.5 4220,4299.05 4326.67,4299.05 4433.33,4299.05 4540,4299.05 4870,4299.05 4976.67,4299.05 5083.33,4299.05 5190,4299.05 5635,4299.05 5741.67,4299.05 5848.33,4299.05 5955,4299.05 6290,4299.05 6396.67,4299.05 6503.33,4299.05 6610,4299.05 3495.25,4325.62 3551.75,4325.62 3608.25,4325.62 3664.75,4325.62 3721.25,4325.62 3777.75,4325.62 4220,4357.5 4326.67,4357.5 4433.33,4357.5 4540,4357.5 4870,4357.5 4976.67,4357.5 5083.33,4357.5 5190,4357.5 5635,4357.5 5741.67,4357.5 5848.33,4357.5 5955,4357.5 6290,4357.5 6396.67,4357.5 6503.33,4357.5 6610,4357.5 3467,4368.75 3523.5,4368.75 3580,4368.75 3636.5,4368.75 3693,4368.75 3749.5,4368.75 3806,4368.75 3495.25,4411.88 3551.75,4411.88 3608.25,4411.88 3664.75,4411.88 3721.25,4411.88 3777.75,4411.88 3467,4455 3523.5,4455 3580,4455 3636.5,4455 3693,4455 3749.5,4455 3806,4455
VCC: D7.1 R2.2 U2.8 U2.9 | length 873.8
  Top Layer w6: 3898.06,3735.94 3898.19,3735.82 U2.8 ; 3898.19,3795.12 U2.9
  Top Layer w8: 3898.06,3795 3898.19,3795.12
  Top Layer w23: v1(3726.93,3765.47) 3868.54,3765.47 ; 3898.06,3735.94 3868.54,3765.47 ; 3898.06,3795 3868.54,3765.47
  Top Layer w30: D7.1 3502.01,3720 v1(3605,3720)
  Top Layer w50: D7.1 R2.2
  Bottom Layer w23: v1(3605,3720) 3681.46,3720 3708.44,3746.98 v1(3726.93,3765.47)
pads on no net: J1.S1 J1.S2 J2.S1 J2.S2 J3.S1 J3.S2 J5.S1 J5.S2 J6.S1 J6.S2 J7.S1 J7.S2 U2.3 U2.7

## Polygon pours and split planes (outlines as drawn)
ARM_R on Top Layer "ARM_R_L01_P041" (solid, pour order 41): 7998.03,2411.18 7998.03,2027.83 7196.06,2027.83 7196.06,1335 8800,1335 8800,2411.18
LEG_R on Top Layer "LEG_R_L01_P044" (solid, pour order 44): 6352.5,2411.18 6352.5,2034.95 5510,2034.95 5510,1335 7195,1335 7195,2411.18
LEG_L on Top Layer "LEG_L_L01_P043" (solid, pour order 43): 4671.97,2411.18 4671.97,2029.8 3833.94,2029.8 3833.94,1335 5510,1335 5510,2411.18
ARM_L on Top Layer "ARM_L_L01_P042" (solid, pour order 42): 3031.97,2411.18 3031.97,2029.8 2230,2029.8 2230,1335 3833.94,1335 3833.94,2411.18
I_SENSE_N on Top Layer "I_SENSE_N_L01_P046" (solid, pour order 46): 2220.82,3155 2220,3155.82 2220,3521.93 3685,3521.93 3685,3165 8795,3165 8795,2416.18 7998.03,2416.18 7998.03,2027.83 7196.06,2027.83 7196.06,2410.12 7195,2411.18 6352.5,2411.18 6352.5,2034.95 5510,2034.95 5510,2411.18 4671.97,2411.18 4671.97,2029.8 3833.94,2029.8 3833.94,2411.18 3031.97,2411.18 3031.97,2029.8 2230,2029.8
I_SENSE_P on Top Layer "I_SENSE_P_L01_P039" (solid, remove dead copper, pour order 39): 3860,3165 3860,3525 6720,3525 6720,3165
SOURCE on Top Layer "SOURCE_L01_P040" (solid, pour order 40): 4196.79,3575 4515.26,3575 4515.26,3733 4578.65,3733 4578.65,3575 5170.26,3575 5170.26,3733 5233.65,3733 5233.65,3575 5930.61,3575 5930.61,3733 5990.95,3733 5990.95,3575 6585.61,3575 6585.61,3733 6695,3733 6695,4082.63 6314.39,4082.63 6314.39,3887 6150,3887 6150,4045 5659.39,4045 5659.39,3887 5490,3887 5490,4045 4899.03,4045 4899.03,3887 4720,3887 4720,4045 4244.03,4045 4244.03,3887.04 4196.79,3887.04
GND on Top Layer "GND_L01_P053" (solid, pour order 53): 8185,4150 6726.49,4150 6726.49,3165 8795,3165 8795,3660 8675,3660
V_IN on Top Layer "V_IN_L01_P045" (solid, remove dead copper, pour order 45): 2225,4092.5 2225,4485 6715,4485 6715,4092.5
GND on Top Layer "GND_L01_P038" (solid, pour order 38): 3618.35,3532.13 3618.35,3849.13 3700.4,3849.13 3799.76,3964.58 3799.76,4082.3 2225,4082.3 2225,3532.13
12v_IN on Top Layer "12V_IN_L01_P037" (solid, pour order 37): 8179.91,4162.73 8682.64,3660 8800,3660 8800,4479.17 8794.17,4485 6725,4469.92 6725,4162.73
no net on Layer 2 "NONET_L03_P049" (solid, pour order 49): 4196.79,3580.49 4196.79,4088.21 4195,4090 4197.5,4092.5 6695,4092.5 6695,3575
no net on Layer 2 "NONET_L03_P051" (solid, pour order 51): 2225,1335 2225,4485 8800,4485 8800,1335.39 8800,1335
V_IN on Layer 2 "V_IN_L03_P050" (solid, remove dead copper, pour order 50): 2225,4092.5 2225,4485 6695,4485 6695,4092.5
GND on Layer 1 "GND_L02_P048" (solid, pour order 48): 2225,1335 2225,4485 8800,4485 8800,1335.39 8800,1335
GND on Bottom Layer "GND_L04_P052" (solid, pour order 52): 2225,1335 2225,4485 8800,4485 8800,1335.39 8800,1335

## Keep-outs
Top Layer:
  lines w10: 8799.8,4485 2225,4485 2225,1335 8800,1335 ; 8800,1335.39 8800,4485